# EAGLE board untitled (EAGLE 5.10)
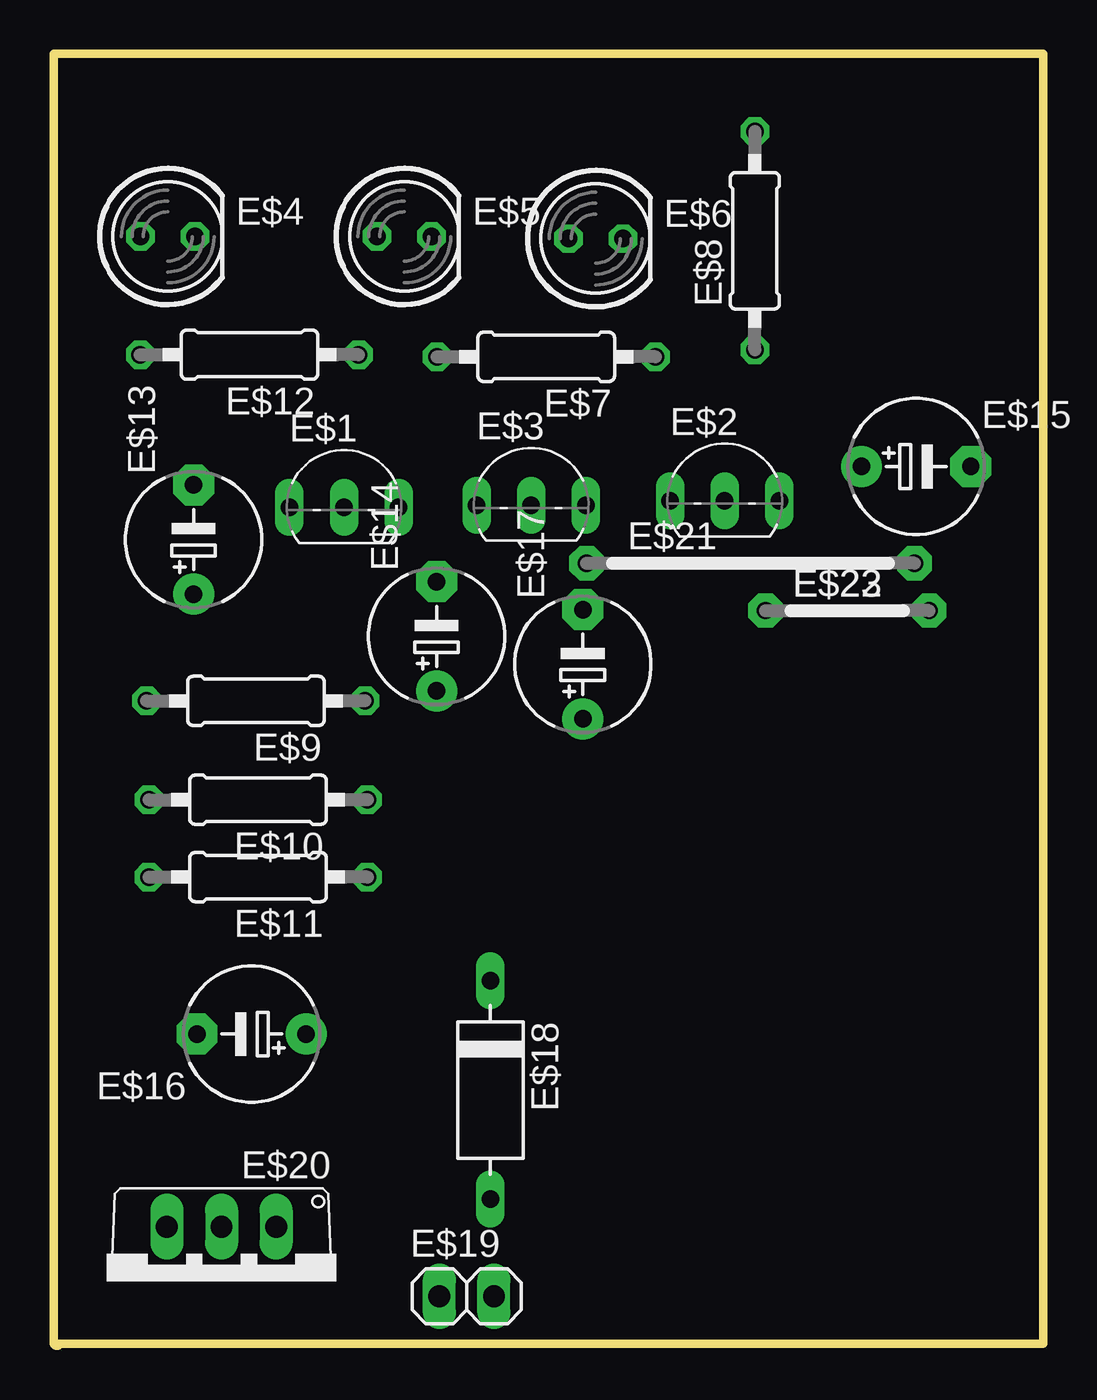
[diagram p0: board, top side]
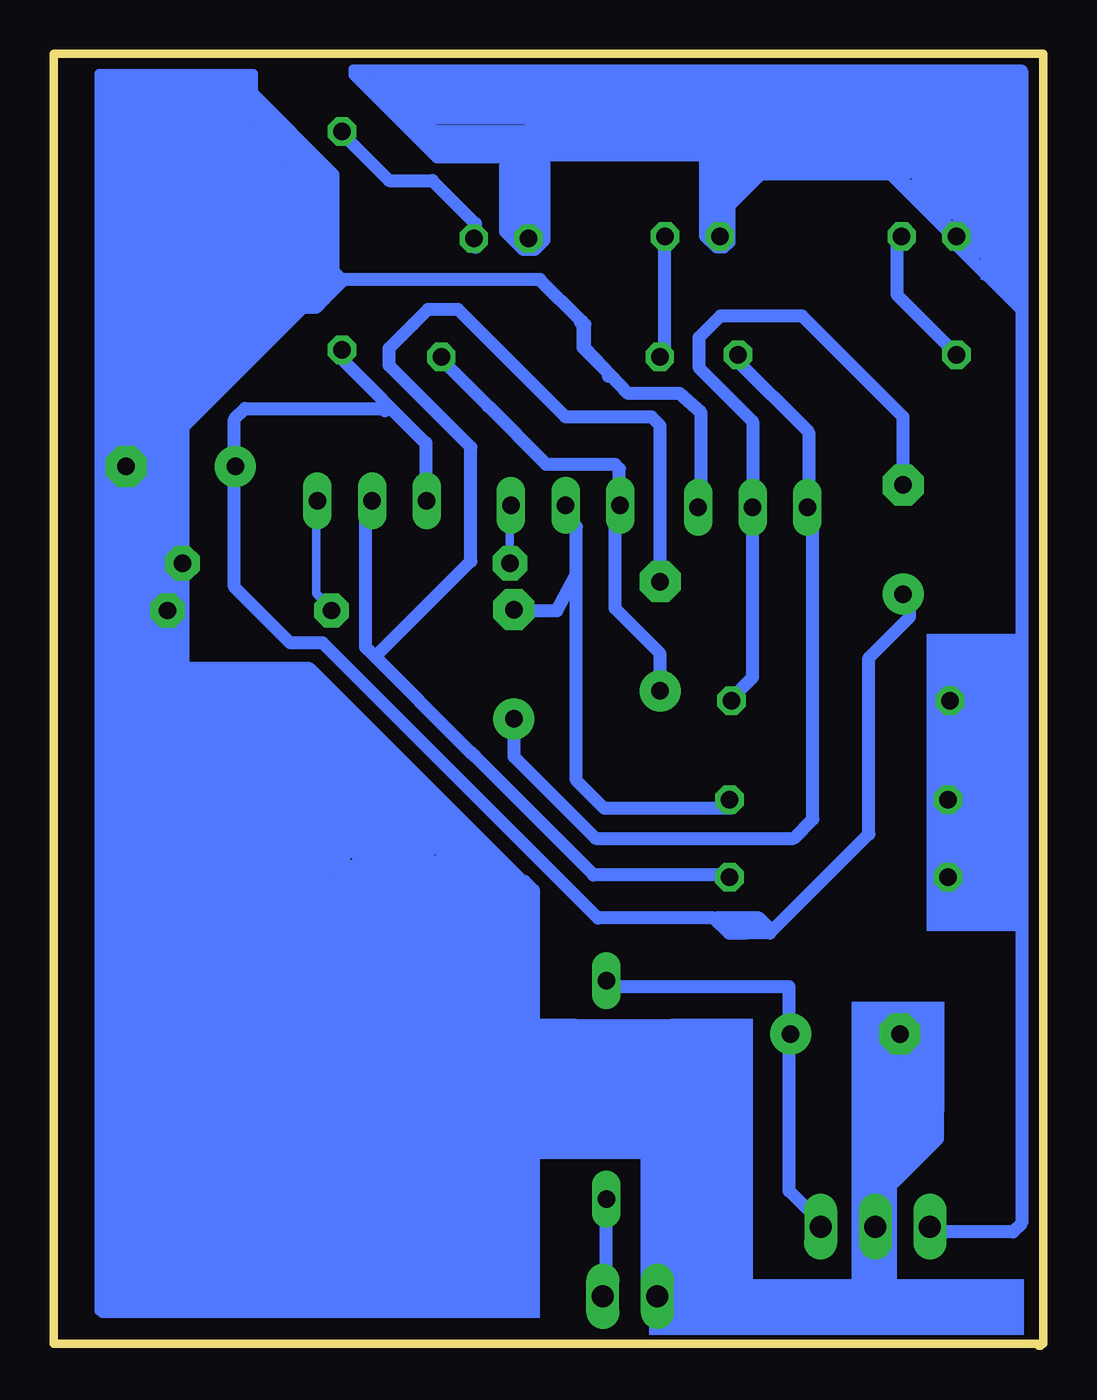
[diagram p1: board, bottom side, seen from below]

Size 46 x 60.1 mm. Coordinates in mm from the lower left corner, seen from the top.
Outline: 0.2,0 0.1,0 0,0.1
Outline: 0,0.1 0,60.1 46,60.1 46,0.1 0,0.1
Copper layers (1*16): Top 0.035mm / dielectric 1.5mm / Bottom 0.035mm
Design rules "default": minimum track width 10mil, minimum drill 24mil, track to track 8mil, track to pad 8mil, pad to pad 8mil, via to via 8mil, smd to smd 8mil, copper to edge 40mil, drill to drill 8mil, minimum pad ring 10mil, minimum via ring 8mil, stop-mask expansion 4mil, vias tented up to drill 0mil, thermal gap 10mil

## Footprints (pad centres in the part's own frame; a part is rotated, then mirrored left to right if it is on the bottom)
TO92-CBE = drill 0.813 long: B 0,0; C -2.54,0; E 2.54,0
LED5MM = drill 0.813 octagon: A -1.27,0; K 1.27,0
0207/10 = drill 0.813 octagon: 1 -5.08,0; 2 5.08,0
E5-6 = drill 0.813 pad 1.905 round: + -2.54,0 | drill 0.813 pad 1.905 octagon: - 2.54,0
D-10 = drill 0.813 long: A 5.08,0; C -5.08,0
1X02 = drill 1.016 long: 1 -1.27,0; 2 1.27,0
TO220V = drill 1.016 long: 1 -2.54,-2.54; 2 0,-2.54; 3 2.54,-2.54
15 = drill 0.813 pad 1.6 octagon: 1 -7.62,0; 2 7.62,0
07 = drill 0.813 pad 1.6 octagon: 1 -3.81,0; 2 3.81,0

## Placement (x,y rotation side)
E$1  [TO92-CBE]  13.5,39 0 top
E$2  [TO92-CBE]  31.2,39.3 0 top
E$3  [TO92-CBE]  22.2,39.1 0 top
E$4  [LED5MM]  5.3,51.6 0 top
E$5  [LED5MM]  16.3,51.6 0 top
E$6  [LED5MM]  25.2,51.5 0 top
E$7  [0207/10]  22.9,46 180 top
E$8  [0207/10]  32.6,51.4 90 top
E$9  [0207/10]  9.4,30 180 top
E$10  [0207/10]  9.5,25.4 180 top
E$11  [0207/10]  9.5,21.8 180 top
E$12  [0207/10]  9.1,46.1 180 top
E$13  [E5-6]  6.5,37.5 90 top
E$14  [E5-6]  17.8,33 90 top
E$15  [E5-6]  40.1,40.9 0 top
E$16  [E5-6]  9.2,14.5 180 top
E$17  [E5-6]  24.6,31.7 90 top
E$18  [D-10]  20.3,11.9 270 top
E$19  [1X02]  19.2,2.3 0 top
E$20  [TO220V]  7.8,3 180 top
E$21  [15]  32.4,36.4 0 top
E$22  [07]  36.9,34.2 0 top
E$23  [07]  36.9,34.2 0 top

## Library data of the parts
E$1-E$3 = transistor
E$4-E$6 = led
E$7-E$17 = rcl
E$18 = diode
E$19 = pinhead
E$20 = linear
E$21-E$23 = jumper

## Tracks (layer width: path | path; a pad name or v marks a point on that pad's centre or on a via)
S$1
  Bottom 0.61: 20.6,2 20.3,2 20.3,6 20.3,7.2
S$2
  Bottom 0.406: 16,39 16,39.4 16,43.5 16.9,44.3 | 21.7,47.8 21.5,47.6 21.5,46.4 20.2,45.1
  Bottom 0.61: 38.2,49.3 38,49.5 32.6,49.5 | 33.4,48.7 33.7,48.7 33.9,48.5 34.2,48.5 34.4,48.3 33.8,48.3 33.4,48.7 | 32.6,49.5 33.4,48.7 | 32.6,49.5 32.5,49.6 23.4,49.6 21.5,47.7 | 21.5,47.7 21.5,47.6 | 20.2,45.1 20.1,45.1 | 21.5,47.7 21.3,47.5 21.3,46.4 19.3,44.3 16.9,44.3 15.9,43.4 15.9,39.5 16,39.4
S$3
  Bottom 0.61: 18.3,2.7 17.2,1.6 7.9,1.6 7.8,1.7 7.8,5 7.8,6.3 7.8,13.5 6.8,14.5
S$4
  Bottom 0.61: 17.9,35.6 17.7,35.6 17.7,35.4
S$5
  Bottom 0.61: 39,44.6 38.4,44.6 36.1,46.9 | 34.5,48.5 36.1,46.9 | 36.1,46.9 36.8,46.9 | 36.8,46.9 37.4,46.9 37.3,46.8 37.3,46 36.8,46.5 36.8,46.9 | 36.8,46.9 34.9,48.8 34.9,49.2
S$6
  Bottom 0.61: 19.7,38.6 19.7,40.8 19.9,41 23.1,41 25.8,43.7 28.1,46
S$7
  Bottom 0.61: 14.5,25 20.4,25 21.7,26.3 21.7,38.1 22.4,38.8
S$8
  Bottom 0.61: 31,39.6 31.5,39.1 31.5,32.5
S$9
  Bottom 0.61: 6.8,51.6 6.8,48.9 4.1,46.2
S$10
  Bottom 0.61: 14.3,45.9 10.9,42.5 10.9,38.3
S$12
  Bottom 0.61: 32.7,46 28.7,42 28.7,39
S$13
  Bottom 0.61: 17.7,46 17.6,46.1 17.6,51.5
S$14
  Bottom 0.61: 32.7,56.5 30.4,54.2 28.4,54.2 26.4,52.2 26.4,51.1
S$15
  Bottom 0.61: 24.6,29.2 24.6,27.4 20.8,23.6 11.6,23.6 10.7,24.5 10.7,38.7 11.1,39.1 11.1,38.8 11,38.7
S$16
  Bottom 0.61: 24.7,34.2 22.6,34.2 21.8,35.7
S$17
  Bottom 0.61: 17.8,30.3 17.8,32.2 19.9,34.3 19.9,39 19.6,39.3
S$18
  Bottom 0.61: 11.6,14.4 11.8,14.4 | 11.8,14.4 11.8,14.6 11.8,16.7 20.3,16.7 20.3,17.1 | 10.1,5.5 11.8,7.2 11.8,14.4
S$19
  Bottom 0.61: 6.5,40.1 6.5,43.2 11.2,47.9 15,47.9 16,46.9 16,45.5 13.5,43 13.5,39.7 13.5,38.7 13.5,31.1 14.6,30
S$21
  Bottom 0.406: 4.8,11.8 4.8,9.6 6.9,7.5 7.4,7.5 5,9.9 5,10.8 5.6,10.2 | 5.6,10.2 6,9.8 | 6,9.8 6.8,9 6.8,8.5 5.2,10.1 5.2,10.4 6.3,9.3 6.8,9.3 6.6,9.5 6.6,11 6.3,10.7 5.2,10.7 5.5,10.4 6.5,10.4 6,9.9 6,9.8 | 6,9.8 6.1,9.9 6.5,9.9 6.2,10.2 5.6,10.2 | 6,9.8 7.3,8.5 7.6,8.5
S$22
  Bottom 0.406: 24.8,36.6 24.8,38.9 | 24.8,39.2 24.8,38.9 | 24.8,38.9 24.7,38.8
S$23
  Bottom 0.406: 33.1,34.3 33.8,35 33.8,39.5
S$24
  Bottom 0.61: 18,1.6 18.4,2 18.4,11.6 21.7,14.9 31.5,14.9
S$25
  Bottom 0.61: 23.7,21.2 24.1,21.6 24.2,21.6 | 24.7,21.6 25.4,21.6 | 33,29.9 24.7,21.6 | 24.7,21.6 24.2,21.6 | 24.2,21.6 34.1,31.5 39.7,31.5 38.4,30.2 33.4,30.2 34.2,31 34.2,31.2 32.7,29.7 32.7,22 32.6,21.9 29.7,21.9 | 26.9,21.9 25.5,21.9 28,24.4 33.5,24.4 31.2,22.1 29.9,22.1 29.7,21.9 | 29.7,21.9 26.9,21.9 | 26.9,21.9 27.4,22.4 | 27.4,22.4 30.3,22.4 30.4,22.3 32.5,22.3 32.5,23.1 32.4,23.2 32.2,23.2 31.8,22.8 30.5,22.8 30.4,22.7 29.3,22.7 29.2,22.6 29.1,22.6 29,22.5 28.6,22.5 | 28.6,22.5 27.5,22.5 27.4,22.4 | 27.4,22.4 27,22.4 26.9,22.3 26.6,22.3 26.5,22.2 26.4,22.2 32.4,28.2 32.4,28.7 28.2,24.5 28.2,23.9 27.7,23.4 27.7,22.7 28.5,23.5 32.2,23.5 31.8,23.9 28.5,23.9 28.6,23.8 28.6,22.5 | 28.6,22.5 29.3,23.2 31.7,23.2 31.1,22.6 28.5,22.6 29.7,23.8 32.6,23.8 32.3,24.1 32.3,25.1 | 32.3,25.1 32.3,25.9 | 32.3,25.9 32.3,27.5 29.5,24.7 29.5,24.6 30,25.1 32.3,25.1 | 32.3,25.1 32,24.8 30.7,24.8 30.6,24.9 30,24.9 31.6,26.5 32.2,26.5 31,25.3 31,25.2 31.7,25.9 32,25.9 | 32.3,25.9 32.6,25.9 31.9,25.2 31.4,25.2 31.4,25.3 32,25.9 | 32,25.9 32.3,25.9
S$26
  Bottom 0.61: 24.9,21.2 24.8,21.1 23.7,21.1 23.7,21
S$27
  Bottom 0.406: 4.1,51.3 4.1,51.4 7.1,54.4 13.1,54.4 14.5,53 14.5,51.3 14.8,51 15.2,51 15.8,51.6 15.8,55.1 15.7,55.1 15,54.4
  Bottom 0.61: 24,56 20.7,59.3 1,59.3 1,48.2 | 4.1,51.3 1,48.2 | 1,48.2 1,30.1 | 1,20.9 1,5.7 1.4,5.3 5.1,5.3 | 4.2,29.9 4,30.1 1,30.1 | 1,30.1 1,25.6 | 1,25.6 1,20.9 | 1,20.9 1.4,21.3 4.3,21.3 | 4.4,25.1 3.9,25.6 1,25.6
S$28
  Bottom 0.61: 14.5,19.5 12.8,19.5 13.2,19.9 15.2,19.9 14.5,19.2 13.9,19.2 | 6.2,34.7 6.2,33.9 8.1,32 8.1,23.8 12.7,19.2 13.8,19.2 13.9,19.2 | 13.8,19.3 13.9,19.2 | 13.9,19.2 14.6,19.2 15.3,19.9 20.7,19.9 33.5,32.7 35,32.7 37.6,35.3 37.6,43.1 37.1,43.6 30.7,43.6 30.6,43.5
S$29
  Bottom 0.61: 15.2,51.8 15.2,55.1 13.5,55.1 14.7,53.9 14.8,53.9 14.6,54.1 14.6,54.8 14.5,54.9 14.2,54.9 14.8,54.3 14.8,53.7 14.8,53.4
S$30
  Bottom 0.61: 13.3,38.6 13.8,39.1
S$31
  Bottom 0.61: 35.4,49.7 35.4,50.4 35.3,50.5
S$32
  Bottom 0.61: 35.3,50.6 38.8,50.6 38.9,50.7
S$33
  Bottom 0.406: 33.8,48.8 40,42.6 40,30.1 39.9,30
S$34
  Bottom 0.406: 17.1,14.8 17.3,15 22,15
S$35
  Bottom 0.406: 43.2,52.2 43.7,51.7 43.7,45.5
S$36
  Bottom 0.406: 43.1,45.3 43.6,45.3 43.7,45.4 43.7,36.8 43.6,36.7 43.7,36.7 43.7,24.8 | 43.7,24.8 43.5,24.6 | 43.6,25.1 43.6,24.9 43.7,24.8 | 43.7,24.8 43.7,1.5 37,1.5 33.6,4.9
S$37
  Bottom 0.61: 14.6,21.9 20.9,21.9 26.4,27.4 26.6,27.6 31.4,32.4
S$39
  Bottom 0.406: 33.1,53.4 33.1,54.4 | 33.1,54.4 33.1,54.6 36.7,58.2 | 36.7,58.2 36.7,59.1 | 36.7,58.2 36.7,57.7 35.4,56.4 35.4,56.3 33.3,54.2 33.3,54.6 34.6,55.9 34.6,54.8 34,54.2 36.5,54.2 36.8,54.5 36.5,54.5 | 34.1,54.5 33.4,53.8 34.5,53.8 36.2,55.5 | 37,54.2 37,54 34.6,54 34.1,54.5 | 36.5,54.5 34.1,54.5 | 36.2,54.6 36.3,54.6 36.7,55 36.7,56.1 36.5,56.3 36.5,56.1 35.3,54.9 35.9,54.9 36.5,55.5 36.5,54.9 36.2,54.6 | 36.2,55.5 36.2,54.6 | 36.5,54.5 36.8,54.8 36.8,56.1 | 36.8,56.1 36.8,56.5 36.5,56.8 36.5,56.5 35.5,55.5 | 36.8,56.1 36.2,55.5 | 36.2,54.6 34.6,54.6 35.5,55.5 | 36.8,56.1 36.3,56.1 35.5,55.3 35.5,55.5 | 36.2,55.5 34.9,55.5 34.7,55.7 34.7,55.9 35.1,56.3 35,56.3 33.1,54.4 | 33.1,54.4 33,54.4 | 32.9,54.5 32.9,50 32.6,49.7 34,49.7 | 33,54.3 33,54.4 | 33,54.4 32.9,54.5 | 32.9,54.5 36.8,58.4 36.8,59.1 36.7,59.2 43.7,59.2 | 43.7,58.8 43.7,59.2 | 43.7,59.2 43.9,59.2 43.9,1.6 43.8,1.5 42,1.5 41,2.5
S$40
  Bottom 0.406: 37,59.1 37,57.5 33.5,54
S$41
  Bottom 0.406: 36.7,57.5 36.9,57.3 36.9,54.2 36.7,54 33.8,54 33.6,54.2
S$42
  Bottom 0.406: 23.8,55.3 23.8,55.2 28.2,55.2 32.1,59.1 31.7,59.1 28,55.4 24.6,55.4 24.3,55.7 28,55.7 28.3,56 28.9,56 32.1,59.2 32.1,59.4 29.1,59.4 27.2,57.5 | 18.6,59.4 20.9,59.4 22.8,57.5 24.2,56.1 24.2,51.5 24,51.3 24,55.7 22.8,56.9
  Bottom 0.61: 23.9,56 28.3,56 28.5,56 31.8,59.3 20,59.3 19.8,59.1 30.5,59.1 30.9,58.7 22,58.7 21.4,58.1 30.1,58.1 30.3,58.3 23.6,58.3 22.8,57.5 27.2,57.5 29.4,57.5 29.6,57.7 29.5,57.7 28.3,56.5 24,56.5 23.4,57.1 29.1,57.1
S$43
  Bottom 0.406: 25.1,54.9 25.1,51.8 24.2,50.9 23.6,50.9 23.1,51.4 23.1,55 23.4,55 23.5,54.9 23.5,51.8 24.2,51.8 24.4,51.6 24.9,52.1 24.9,54.8 24.7,55 24.6,55 | 24.6,55 24.4,55 24.4,52.1 24.5,52 24.5,54.9 24.6,55 | 24.6,55 24.6,52.4 23.9,51.7 24,51.7 24.1,51.6
  Bottom 0.61: 3.8,51.5 7.1,54.8 13.2,54.8 14.9,53.1 14.9,51.2 15.6,51.9 15.6,55.3 16.5,56.2 23.4,56.2 23.9,55.7 23.9,51.7 23.9,51.1
S$44
  Bottom 0.61: 17.9,35.5 17.8,35.5 17.8,42.8 18.2,43.2 22.2,43.2 27.2,48.2 28.6,48.2 29.3,47.5 29.8,47 30.4,46.4 30.4,45.6 26.6,41.8 26.6,36.5 30.9,32.2
(copper drawn outside any net)
  shapes: Bottom area x63